# Altium PCB PCB2.PcbDoc
Units mil, origin at the board's own origin, x right, y up, seen from the top; angles counter-clockwise.
Board outline 2320 x 2000 mil, 2 copper layers (Top Layer, Bottom Layer); 36 components, 23 nets, 154 pads, 22 vias.
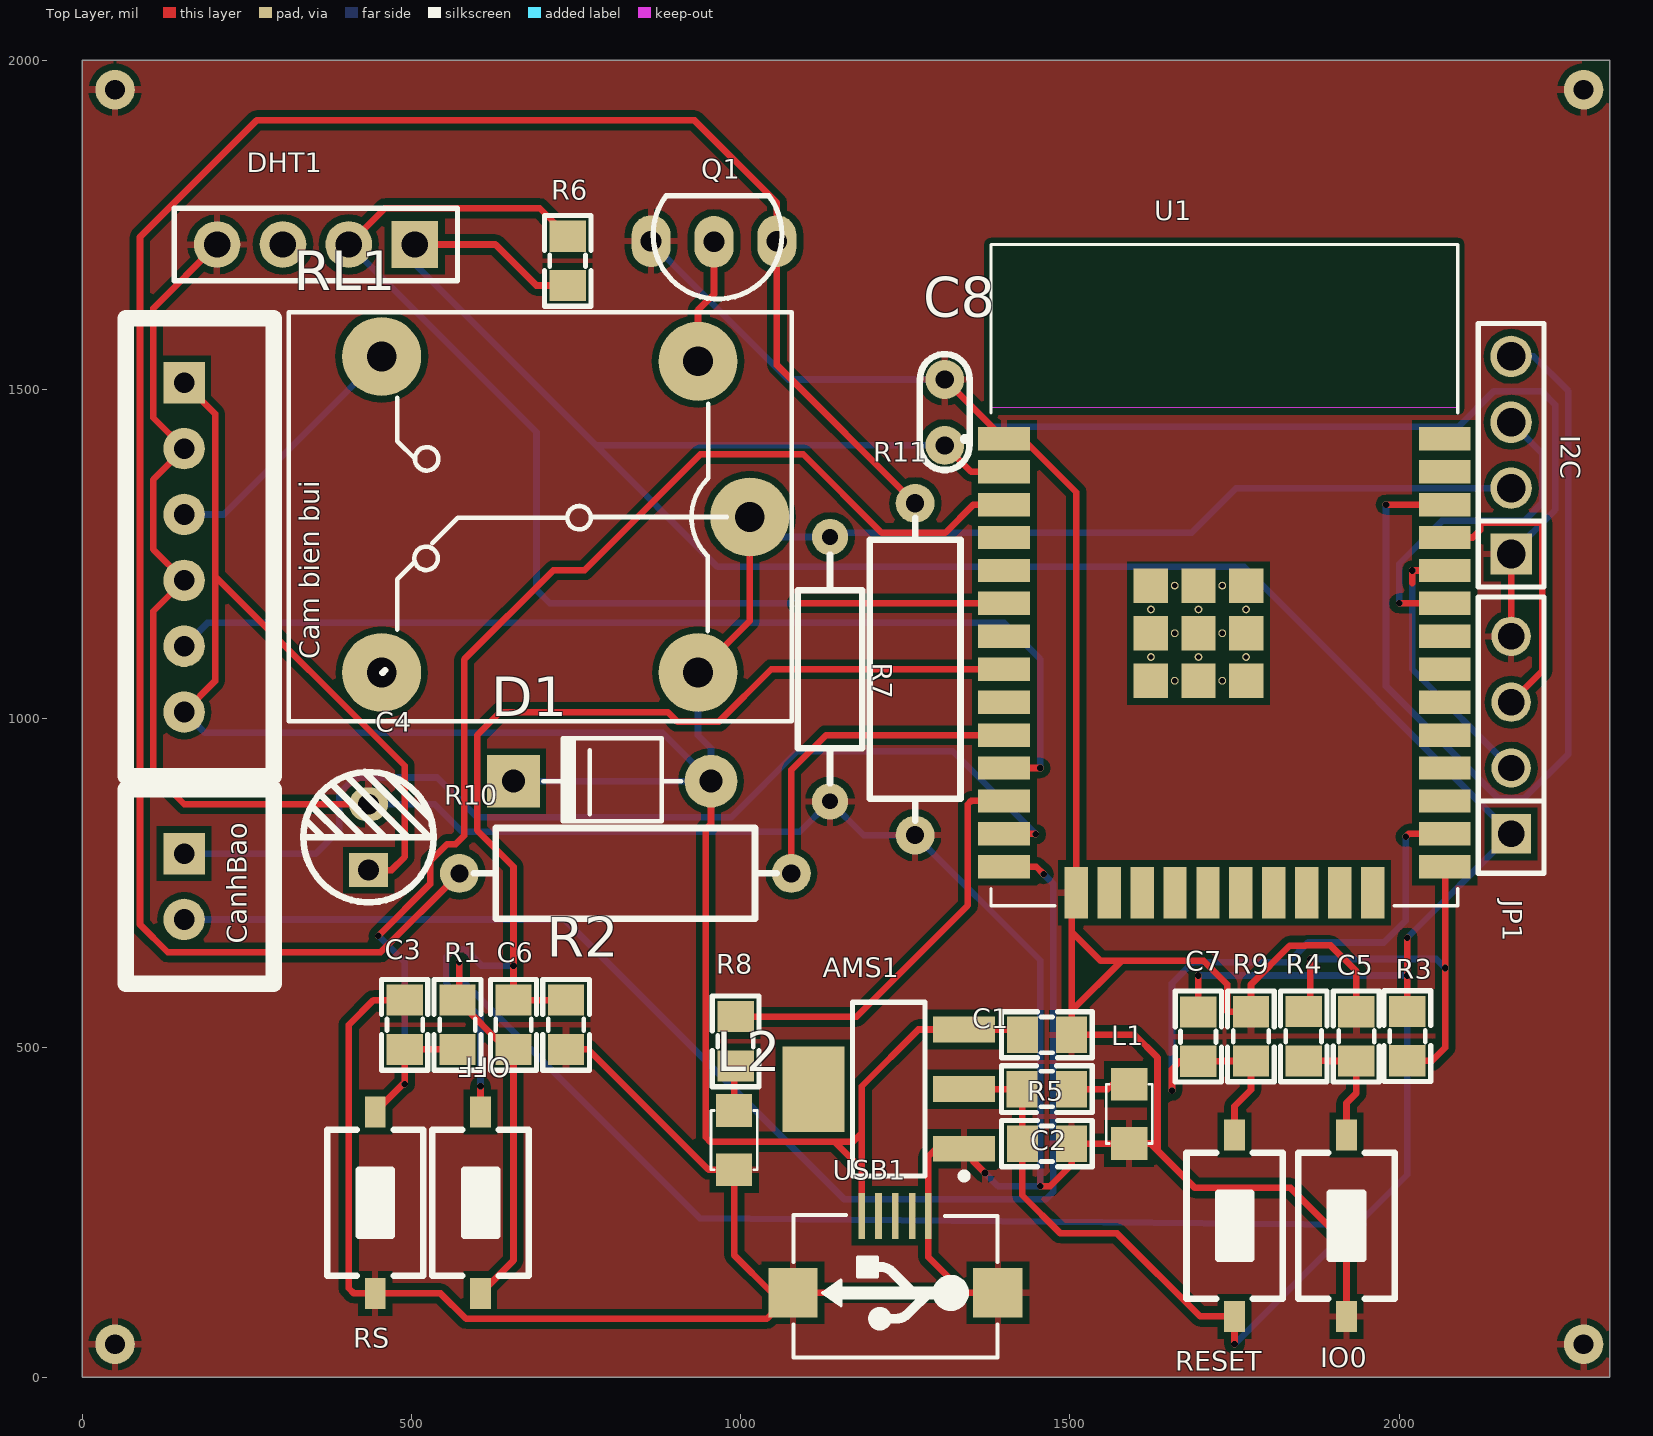
[diagram p0: Top Layer view]
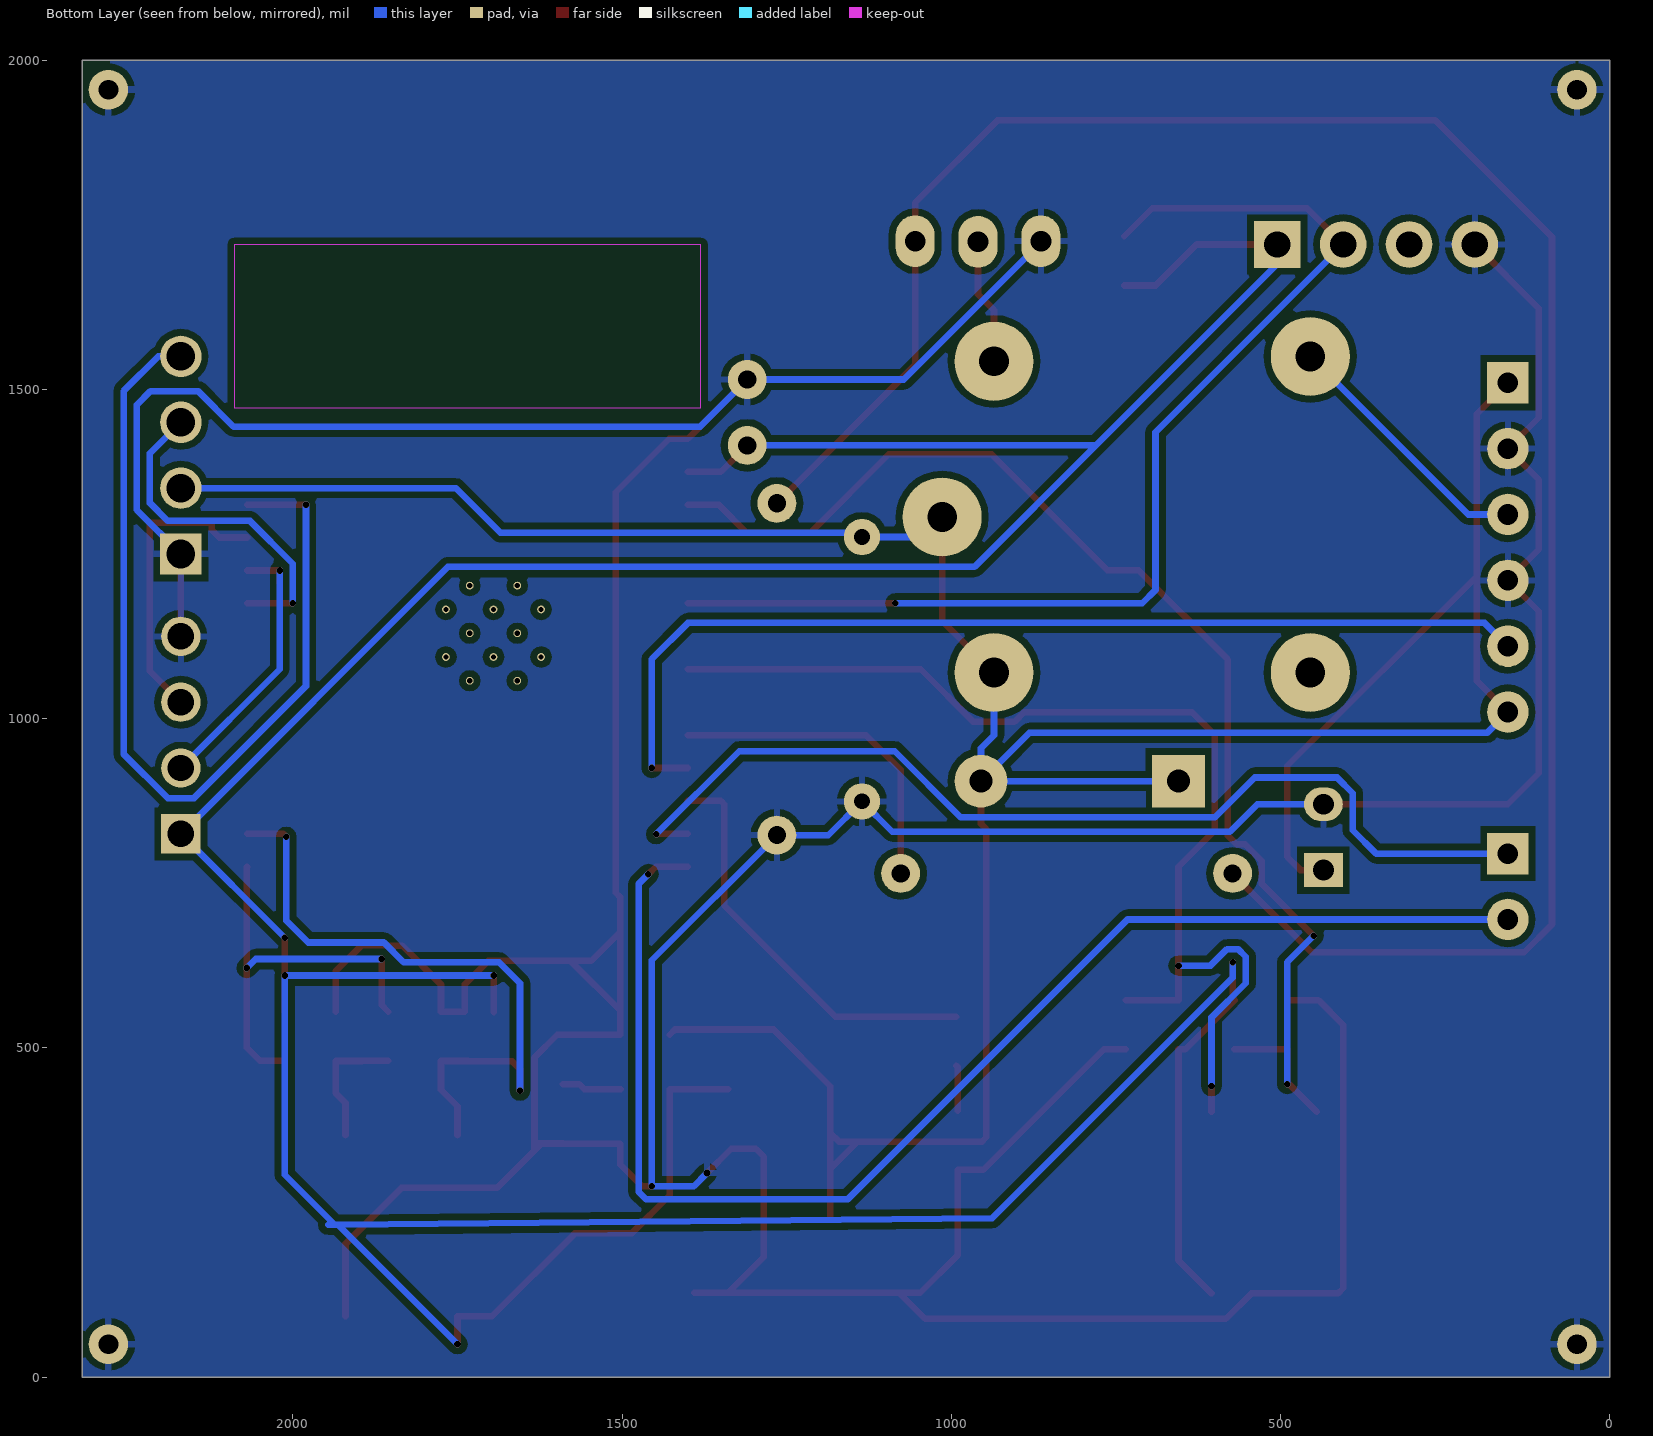
[diagram p1: Bottom Layer view, seen from below]
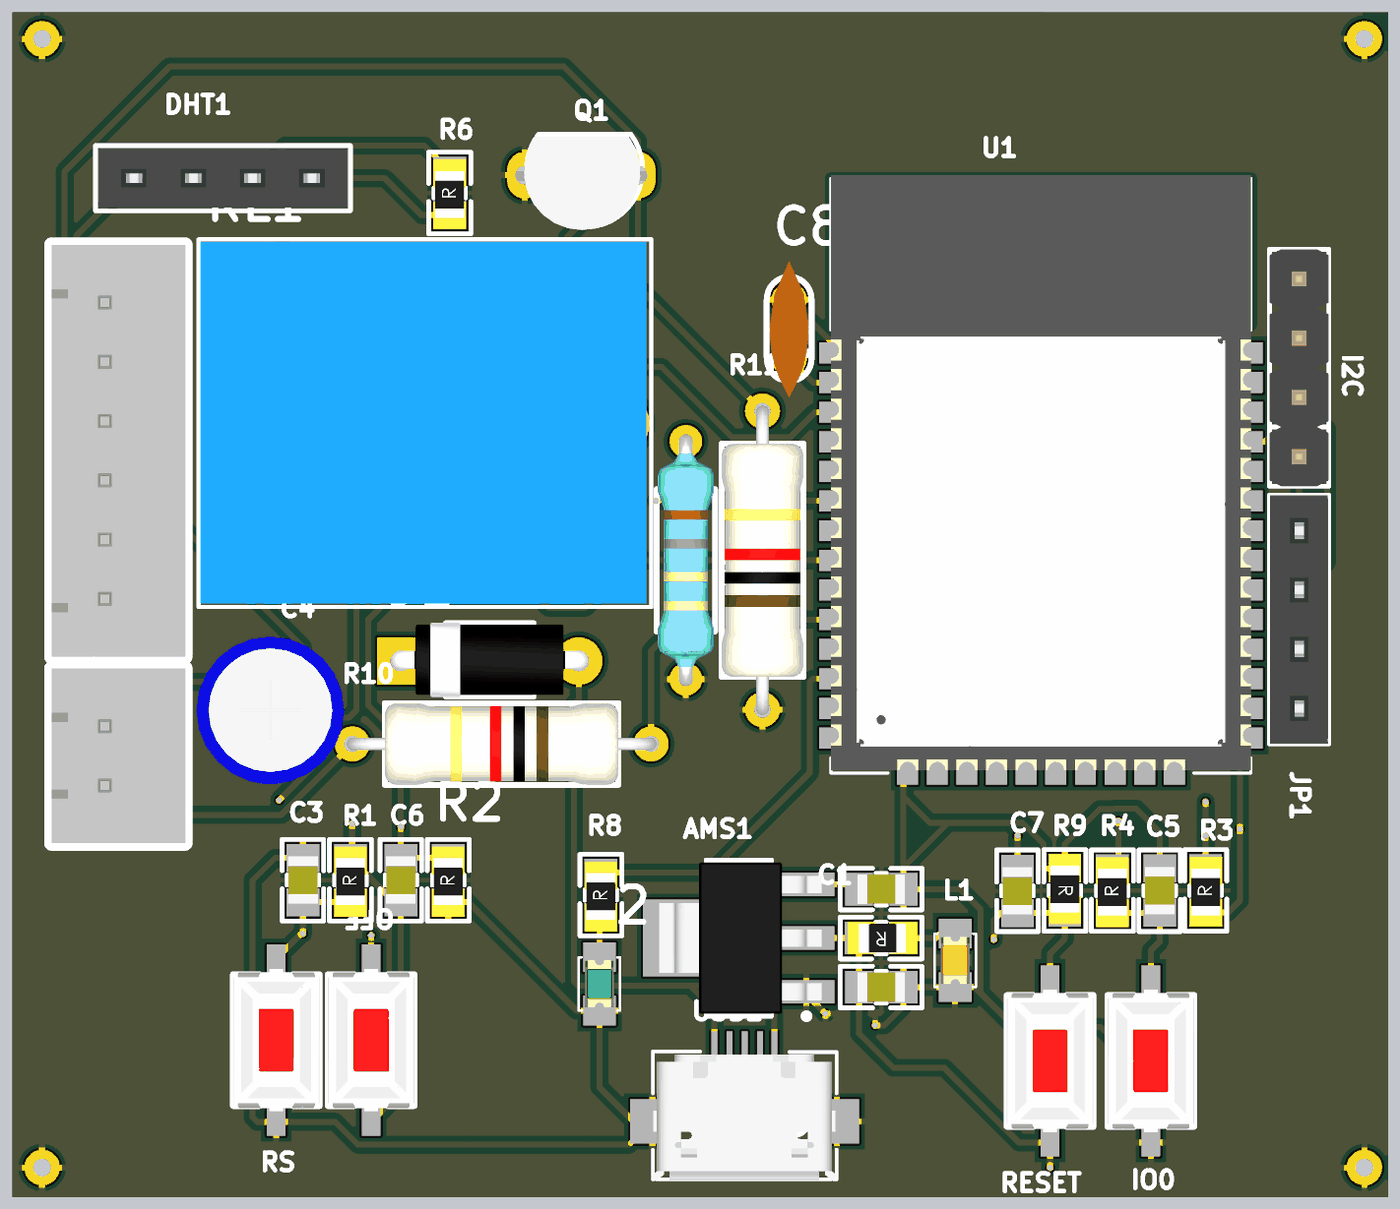
[diagram p2: 3D render of the assembled board from above, using the file's embedded part models]

## Layer stack, top to bottom
Top Solder: solder mask 0.4, Solder Resist, Dk 3.5
Top Layer: signal copper 1.4
Dielectric 1: dielectric 12.6, FR-4, Dk 4.8
Bottom Layer: signal copper 1.4
Bottom Solder: solder mask 0.4, Solder Resist, Dk 3.5

## Board outline
0,2000 2320,2000 2320,0 0,0

## Design rules (kind name [scope] priority, off if disabled: settings)
Clearance [All] p1: gap=10 ignorepadtopadclearanceinfootprint=FALSE except(0: Arc-Hole Track-Hole SMDPad-Hole THPad-Hole Via-Hole Fill-Hole Poly-Hole Region-Hole Text-Hole)
PolygonConnect [All] p1: connectstyle=Relief reliefconductorwidth=10 reliefentries=4 polygonreliefangle="90 Angle" airgapwidth=10
RoutingVias [All] p1: holewidth=10 width=10 viastyle="Through Hole" minholewidth=10 minwidth=10 maxholewidth=28 maxwidth=50
SolderMaskExpansion [All] p1: expansion=4
Width [All] p1: maxlimit=50 minlimit=10 preferedwidth=10 minimp=50.000000 maximp=50.000000 favimp=50.000000
30 further rules are at their usual default settings.

## Components (designator, comment, footprint, x,y, rotation, side; value= is the part's Value field where it differs from the comment)
AMS1 "AMS1117-3.3V" SOT223 1225,437.4 r90 top value="AMS1117-3.3V SOT223"
C1 "10uF" "tu 0805" 1465,520 r0 top
C2 "10uF" "tu 0805" 1465,354.58 r0 top
C3 "101" "tu 0805" 489.87,535 r90 top
C4 "220uF" "Tu hoa 5mm" 435,820 r90 top
C5 "101" "tu 0805" 1934.87,517.29 r90 top
C6 "101" "tu 0805" 655,535 r90 top
C7 "101" "tu 0805" 1695,517.29 r270 top
C8 "104" "tu gom" 1310,1465 r270 top
"Cam bien bui" "Cam bien bui" XH2.54M-6 155,1510 r270 top
CanhBao "Header 2P 2.54 Duc Thang" XH2.54M-2 155,795 r270 top
D1 "100v" "DIODE 1A" 1005,905 r0 top
DHT1 "DHT22" DHT22 355,1720 r180 top
I2C "JP 1x4 2.54" "JP 1x4 DT" 2170,1250 r90 top
IO0 "Nut Nhan 2 Chan SMD 3x6x2.5" "Nut Nhan 2 Chan SMD 3x6x2.5" 1920,230 r90 top
JP1 "chan nap" "JP 1x4 CT" 2170,825 r90 top
L1 "LED 0805" LED-0805-Orange 1590,444.8 r270 top
L2 "LED 0805" LED-0805-Green 990,405 r270 top
OFF "Nut Nhan 2 Chan SMD 3x6x2.5" "Nut Nhan 2 Chan SMD 3x6x2.5" 605,265 r270 top
Q1 "NPN" TRAN-LOWPOWER 965,1730 r90 top
R1 "10k" "tro smd 0805" 567.61,535 r90 top
R2 "470R" "Tro SMD 0805" 732.53,535 r90 top
R3 "12k" "tro smd 0805" 2010,517.77 r90 top
R4 "470R" "Tro SMD 0805" 1852.61,517.43 r90 top
R5 "1k" "tro smd 0805" 1465,435 r180 top
R6 "10k" "tro smd 0805" 735,1695 r90 top
R7 "1.5k" "tro vach 1/4w" 1135.74,1075 r90 top
R8 "330" "Tro SMD 0805" 990,510 r90 top
R9 "470R" "Tro SMD 0805" 1777.39,517.64 r270 top
R10 "0.33R" "tro vach 1/2w" 825,765 r180 top
R11 "10k" "tro vach 1/2w" 1265,1075 r90 top
RESET "Nut Nhan 2 Chan SMD 3x6x2.5" "Nut Nhan 2 Chan SMD 3x6x2.5" 1750,230 r270 top
RL1 "Relay" "Relay 5 Chan SRD" 1014.06,1306.22 r180 top
RS "Nut Nhan 2 Chan SMD 3x6x2.5" "Nut Nhan 2 Chan SMD 3x6x2.5" 445,265 r90 top
U1 "ESP32 WROOM 32" ESP32-WROOM-32D 1734.65,1217.91 r0 top
USB1 "USB Micro 5p SMD" "USB Micro 5p SMD" 1235,245 r180 top

## Footprints (in the part's own frame and the unit in brackets; to place one, negate y for a bottom-side part, rotate by r counter-clockwise, add the part's x,y. Pads: shape width x height; smd on the part's side, far side on the other; paste and mask are expansions set on the pad)
DHT22 [mm]
  rect 1.8x1.8 hole 1.02: 1(-3.81,0)
  round 1.8 hole 1.02: 2(-1.27,0) 3(1.27,0) 4(3.81,0)
  silkscreen extent -5.46,-1.4 5.46,1.4, body extent -7.86,-5.84 7.61,2.31, height 35.57
"DIODE 1A" [mil] "Diode 1A"
  round 80 hole 35: 1(-50,0)
  rect 80x80 hole 35: 2(-350,0)
  silkscreen extent -305,-61 -95,65, body extent -366,-61 -34,65, height 122
ESP32-WROOM-32D [mm]
  rect 2x0.9 smd: 1(-8.5,5.26) 2(-8.5,3.99) 3(-8.5,2.72) 4(-8.5,1.45) 5(-8.5,0.18) 6(-8.5,-1.09) 7(-8.5,-2.36) 8(-8.5,-3.63) 9(-8.5,-4.9) 10(-8.5,-6.17) 11(-8.5,-7.44) 12(-8.5,-8.71) 13(-8.5,-9.98) 14(-8.5,-11.25) 25(8.5,-11.25) 26(8.5,-9.98) 27(8.5,-8.71) 28(8.5,-7.44) 29(8.5,-6.17) 30(8.5,-4.9) 31(8.5,-3.63) 32(8.5,-2.36) 33(8.5,-1.09) 34(8.5,0.18) 35(8.5,1.45) 36(8.5,2.72) 37(8.5,3.99) 38(8.5,5.26)
  rect 0.9x2 smd: 15(-5.715,-12.25) 16(-4.445,-12.25) 17(-3.175,-12.25) 18(-1.905,-12.25) 19(-0.635,-12.25) 20(0.635,-12.25) 21(1.905,-12.25) 22(3.175,-12.25) 23(4.445,-12.25) 24(5.715,-12.25)
  rect 1.33x1.33 smd: 39(-2.835,-4.075) 39(-2.835,-2.24) 39(-2.835,-0.405) 39(-1,-4.075) 39(-1,-2.24) 39(-1,-0.405) 39(0.835,-4.075) 39(0.835,-2.24) 39(0.835,-0.405)
  round 0.3 hole 0.2: 39(-2.835,-3.157) 39(-2.835,-1.322) 39(-1.917,-4.075) 39(-1.917,-2.24) 39(-1.917,-0.405) 39(-1,-3.157) 39(-1,-1.322) 39(-0.082,-4.075) 39(-0.082,-2.24) 39(-0.082,-0.405) 39(0.835,-3.157) 39(0.835,-1.322)
  Keep-Out Layer region: 9,6.45 -9,6.45 -9,12.75 9,12.75
  Keep-Out Layer region: 9,6.45 -9,6.45 -9,12.75 9,12.75
  silkscreen extent -10.1,-12.75 9,12.75, body extent -9,-12.62 9,12.88, height 3.2
"JP 1x4 CT" [mm]
  rect 1.52x1.52 hole 1.02: 1(0,0)
  round 1.52 hole 1.02: 2(2.54,0) 3(5.08,0) 4(7.62,0)
  silkscreen extent -1.52,-1.27 9.14,1.27, body extent -1.52,-1.25 9.14,1.25, height 8.51
"JP 1x4 DT" [mm] "4 pins, 1 row, straight, gold plating"
  rect 1.6x1.6 hole 1.1: 1(0,0)
  round 1.6 hole 1.1: 2(2.54,0) 3(5.08,0) 4(7.62,0)
  silkscreen extent -1.27,-1.27 8.89,1.27, body extent -1.27,-1.27 8.89,1.27, height 8.54
LED-0805-Green [mil]
  rect 50x55 smd: 1(0,0) 2(90,0)
  silkscreen extent 0,-35 90,35, body extent 5,-25 85,25, height 43
LED-0805-Orange [mil]
  rect 50x55 smd: 1(0,0) 2(90,0)
  silkscreen extent 0,-35 90,35, body extent 5,-25 85,25, height 43
"Nut Nhan 2 Chan SMD 3x6x2.5" [mm] "Switch SMD type"
  rect 1.2x0.8 smd: 1(-3.5,0) 2(3.5,0)
  silkscreen extent -2.82,-1.85 2.82,1.85, body extent -3.05,-1.85 3.05,1.85, height 2.5
"Relay 5 Chan SRD" [mil] "Relay SPDT, 5 pin, 10A,W 650mil, L 800mil, H 800mil"
  round 120 hole 45: 1(0,0) 2(559.06,236.22) 3(559.06,-243.78) 4(78.74,-236.22) 5(78.74,236.22)
  silkscreen extent -63,-311 700,310, body extent -55,-306 697,304, height 602
SOT223 [mm]
  rect 1x2.4 smd: 1(-2.3,-2.9) 2(0,-2.9) 3(2.3,-2.9)
  rect 3.3x2.4 smd: 4(0,2.9)
  silkscreen extent -3.47,-3.03 3.35,1.4, body extent -3.25,-3.56 3.25,3.4, height 1.68
TRAN-LOWPOWER [mm] "TO, Flat Index; 3 In-Line, Axial Leads; Body Dia. 4.5mm; Leads 0.51 x 0.48 mm (max)"
  oval 2x1.5 hole 0.8: 1(-0.127,-2.286) 2(-0.151,0.139) 3(-0.127,2.564)
  silkscreen extent -2.35,-2.48 1.63,2.48, body extent -2.48,-2.79 1.52,3.01, height 11
"tro smd 0805" [mm]
  rect 1.2x1.4 smd: 1(-0.946,-0.061) 2(0.954,-0.061)
  silkscreen extent -1.75,-0.97 1.75,0.84, body extent -1.56,-0.76 1.44,0.64, height 0.53
"Tro SMD 0805" [mm]
  rect 1.2x1.4 smd: 1(-0.946,-0.061) 2(0.954,-0.061)
  silkscreen extent -1.75,-0.97 1.75,0.84, body extent -1.56,-0.76 1.44,0.64, height 0.53
"tro vach 1/2w" [mm]
  round 1.5 hole 0.7: 1(-6.4,0) 2(6.4,0)
  silkscreen extent -5.84,-1.75 5.84,1.75, body extent -6.62,-1.75 6.62,1.75, height 3.5
"tro vach 1/4w" [mm]
  round 1.4 hole 0.6: 1(-5.1,0) 2(5.1,0)
  silkscreen extent -4.39,-1.25 4.42,1.25, body extent -5.38,-1.2 5.38,1.2, height 2.41
"tu 0805" [mm] "Compoment SMD 80x50mil"
  rect 1.2x1.4 smd: 1(-0.946,-0.003) 2(0.954,-0.003)
  silkscreen extent -1.75,-0.89 1.75,0.89, body extent -1.01,-0.64 1.01,0.63, height 0.61
"tu gom" [mm] "Tu gom mini"
  round 1.5 hole 0.7: 1(-1.27,0) 2(1.27,0)
  silkscreen extent -2.25,-0.97 2.22,0.97, body extent -2.92,-0.85 2.92,0.85, height 6.12
"Tu hoa 5mm" [mm]
  rect 1.3x1.5 hole 0.8: 1(-1.27,0)
  oval 1.3x1.5 hole 0.8: 2(1.27,0)
  silkscreen extent -2.51,-2.51 2.51,2.51, body extent -3.12,-3.18 3.23,3.18, height 14.55
"USB Micro 5p SMD" [mil]
  rect 10x70 smd: 1(51.18,0) 2(25.59,0) 3(0,0) 4(-25.59,0) 5(-50,0)
  rect 74.8x74.8 smd: 5(-155.51,116.84) 5(155.51,116.84)
  silkscreen extent -155,-1 155,215, body extent -157,5 158,218, height 107
XH2.54M-2 [mm]
  rect 1.6x1.6 hole 0.8: 1(0,0)
  round 1.6 hole 0.8: 2(2.54,0)
  silkscreen extent -2.48,-2.26 5.02,3.46, body extent -2.48,-2.26 5.02,3.48, height 6.91
XH2.54M-6 [mm]
  rect 1.6x1.6 hole 0.8: 1(0,0)
  round 1.6 hole 0.8: 2(2.54,0) 3(5.08,0) 4(7.62,0) 5(10.16,0) 6(12.7,0)
  silkscreen extent -2.48,-2.26 15.18,3.46, body extent -2.48,-2.26 15.18,3.48, height 6.91

## Part data
AMS1: library part "AMS1117 SMD", "Dán", Chung_Loai=Dán, Don_Vi=Con, Ma_Hang=MH000596
C1 C2: library part "Tu 0805 10pF 50V 10%", "Dán", Chung_Loai=Dán, Don_Vi=Con, Ma_Hang=MH004554, So_Chan=2, Ten_Linh_Kien="T? 0805 10P 10% 50V"
C3 C5 C6 C7: library part "Tu 0805 101 50V 20%", "Dán", Chung_Loai=Dán, Don_Vi=Con, Ma_Hang=MH002806, So_Chan=2, Ten_Linh_Kien="T? 0805 101-0.1nF 50V 20%"
C4: library part "Tu Hoa 220uF 16V 6x11", "C?m", Chung_Loai=C?m, Don_Vi=Con, Ma_Hang=MH001348, So_Chan=2, Ten_Linh_Kien="T? Hóa 220uF 16V 6x11MM"
C8: library part "Tu gom 104 50V", "C?m", Chung_Loai=C?m, Don_Vi=Con, Ma_Hang=MH004761, So_Chan=2, Ten_Linh_Kien="T? g?m 104 100nF 50V"
"Cam bien bui": library part "Header 6P 2.54 Duc Thang", "C?m", Chung_Loai=C?m, Don_Vi=Con, Ma_Hang=MH001972, Ten_Linh_Kien="Header 6P XH2.54-6P Ð?c Th?ng"
CanhBao: "C?m", Chung_Loai=C?m, Don_Vi=Con, Ma_Hang=MH001283, Ten_Linh_Kien="Header 2P XH2.54-2P Ð?c Th?ng"
D1: library part "Diode 1N4007", "C?m", Chung_Loai=C?m, Don_Vi=Con, Ma_Hang=MH001063, Ten_Linh_Kien="Diode 1N4007 1A (DIP)"
DHT1: Manufacturer="W¨¹rth Elektronik eiSos GmbH", partNo=613004143121, ComponentLink1 Description=Manufacturer, ComponentLink1URL=http://www.we-online.com, ComponentLink2 Description=Datasheet, ComponentLink2URL=http://katalog.we-online.de/em/datasheet/6130xx143121.pdf, Created by="Karrer Zheng", Created Date="29 March 2013", NoPins=04
I2C: library part "JP 1x4 2.54 Duc Thang", "C?m", Chung_Loai=C?m, Don_Vi=Con, Ma_Hang=MH000903, Ten_Linh_Kien="Jump Ðon Ð?c 2.54MM 1x40P Th?ng 11MM"
JP1: library part "JP 1x4 2.54 Cai Thang", "C?m", Chung_Loai=C?m, Don_Vi=Con, Ma_Hang=MH004006, Ten_Linh_Kien="Jump Ðon Cái 2.54MM 1x20P Th?ng"
L1: library part "LED 0805 Cam", "Dán", Chung_Loai=Dán, Don_Vi=Con, Ma_Hang=MH002328, Ten_Linh_Kien="LED 0805 Màu Cam ( Orange)"
L2: library part "LED 0805 Xanh La", "Dán", Chung_Loai=Dán, Don_Vi=Con, Ma_Hang=MH002326, Ten_Linh_Kien="LED 0805 Màu Xanh Lá (Green)"
Q1: "NPN General", PackageDocument=Sep-1998, Code_JEDEC=TO-92A, ComponentLink1Description="Manufacturer Link", ComponentLink1URL=http://www.fairchildsemi.com/, ComponentLink2Description=Datasheet, ComponentLink2URL=http://www.fairchildsemi.com/ds/2N%2F2N3904.pdf, DatasheetDocument=1997, LatestRevisionDate=15-Jan-2003, LatestRevisionNote="PCB Footprint 'BCY-W3/D4.7' replaced", PackageReference=TO-92A, Published=8-Jun-2000, Publisher="Altium Limited"
R1: library part "Tro 0805 1% 10k", "Dán", Chung_Loai=Dán, Don_Vi=Con, Ma_Hang=MH005473, So_Chan=2, Ten_Linh_Kien="Tr? 0805 1% 10k"
R2 R4 R8 R9: library part "Tro 0805 5% 470R", "Dán", Chung_Loai=Dán, Don_Vi=Con, Ma_Hang=MH005341, So_Chan=2, Ten_Linh_Kien="Tr? 0805 5% 470R"
R3: library part "Tro 0805 5% 12k", "Dán", Chung_Loai=Dán, Don_Vi=Con, Ma_Hang=MH005241, So_Chan=2, Ten_Linh_Kien="Tr? 0805 5% 12k"
R5: library part "Tro 0805 1% 1k", "Dán", Chung_Loai=Dán, Don_Vi=Con, Ma_Hang=MH005468, So_Chan=2, Ten_Linh_Kien="Tr? 0805 1% 1k"
R6: library part "Tro 0805 5% 10k", "Dán", Chung_Loai=Dán, Don_Vi=Con, Ma_Hang=MH005239, So_Chan=2, Ten_Linh_Kien="Tr? 0805 5% 10k"
R7: library part "Tro Vach 1/4W 5% 1.5k", "C?m", Chung_Loai=C?m, Don_Vi=Con, Ma_Hang=MH007284, So_Chan=2, Ten_Linh_Kien="Tr? V?ch 1/4w 5% 1.5k"
R10: library part "Tro Vach 1/2W 5% 0.33R", "C?m", Chung_Loai=C?m, Don_Vi=Con, Ma_Hang=MH007239, So_Chan=2, Ten_Linh_Kien="Tr? 5% 1/2w 0.33R"
R11: library part "Tro Vach 1/2W 5% 10k", "C?m", Chung_Loai=C?m, Don_Vi=Con, Ma_Hang=MH006206, So_Chan=2, Ten_Linh_Kien="Tr? 5% 1/2w 10k"
RL1: library part "Relay 5 Chan SRD", "Relay 5 Chan", Ma_Hang=MH009374, Ten="Relay 5V10A SRD-05VDC-SL-C Chính Hãng"
USB1: "USB Type B", Ma_Hang=MH001020, Ten="MicroUSB MK5P SMD"
IO0 OFF RESET RS: Ma_Hang=MH001036, Ten="Nút Nh?n 2 Chân 3x6x2.5MM SMD"

## Free pads (board coordinates)
  round 60 hole 30: 2(2280,1955) 3(50,1955) 4(50,50) 5(2280,50)

## Via types
v1: diameter 10, hole 10, Top Layer to Bottom Layer, 22 vias

## Nets (pads, with @x,y where several pads share a name; then routed paths per layer and width w, separated by ;. In a path a pad name is that pad's centre, name@x,y a point inside that pad or via, vN(x,y) a via of type N, cw(c..) or ccw(c..) an arc to the next point about the centre after c; other vN are vias at no path point)
3V3: AMS1.2 C2.1 C6.1 C7.1 C8.2 DHT1.1 JP1.1 OFF.2 R1.2 R3.2 R5.2 R6.1 RESET.2 U1.2 | length 7126.4
  Top Layer w10: DHT1.1 627.7,1720 689.92,1657.77 R6.1 ; v1(573.03,630) 573.03,575.61 R1.2 644.8,497.77 C6.1 655.13,177.34 OFF.2 ; C8.2 1350,1375 U1.2 ; AMS1.2 R5.2 1427.42,354.79 C2.1 1427.77,276.33 1485.77,218.33 1571.67,218.33 1697.79,92.21 RESET.2 v1(1750,50) ; C7.1 1695,554.65 v1(1695,610) ; R3.2 v1(2012.39,610) v1(2012.39,667.39)
  Bottom Layer w10: DHT1.1 505,1690.33 780.33,1415 ; v1(573.03,630) 573.03,606.54 938.24,241.33 1931.48,231.48 ; C8.2 780.33,1415 ; v1(1695,610) v1(2012.39,610) 2012.39,307.39 1936.43,231.43 ; v1(1750,50) 1931.48,231.48 ; 1946.33,231.33 1936.43,231.43 ; v1(2012.39,667.39) JP1.1 1764.67,1230.33 965,1230.33 780.33,1415 ; 1931.48,231.48 1936.43,231.43
5V: "Cam bien bui.1" "Cam bien bui.6" AMS1.3 C1.1 C4.1 D1.1 D1.2 I2C.2 R7.2 RL1.1 RL1.5 USB1.1 | length 5259.8
  Top Layer w10: 155,1010 202,1057 202,1216.33 ; 155,1510 202,1463 202,1216.33 ; C4.1 470,770 490,790 490,928.33 202,1216.33 ; RL1.5 1014.06,1148.74 RL1.1 ; D1.1 955,840.33 947,832.33 947,364.33 954,357.33 1142.82,357.33 ; USB1.1 1183.82,316.33 ; C1.1 1419.69,527.95 AMS1.3 1270,527.95 1183.82,441.77 1183.82,371.15 ; 1142.82,357.33 1170,357.33 1183.82,371.15 ; 1142.82,357.33 1183.82,316.33 ; 1183.82,316.33 1183.82,371.15
  Bottom Layer w10: 155,1010 186.67,978.33 881.67,978.33 D1.1 ; D1.2 D1.1 ; RL1.5 935.32,974.68 955,955 D1.1 ; RL1.1 1044.49,1275.79 R7.2 1142.4,1282.44 1685.11,1282.44 1752.67,1350 I2C.2
coi: CanhBao.2 U1.14 | length 2053.9
  Top Layer w10: U1.14 1449,775 v1(1460,764)
  Bottom Layer w10: CanhBao.2 732.53,695 1157.53,270 1463.28,270 1475,281.72 1475,749 v1(1460,764)
denbao: CanhBao.1 U1.13 | length 1541.8
  Top Layer w10: U1.13 1447.67,825 v1(1448.33,824.33)
  Bottom Layer w10: CanhBao.1 355,795 390.47,830.47 390.47,886.81 414.25,910.59 539.41,910.59 600,850 985.67,850 1086.1,950.44 1322.23,950.44 v1(1448.33,824.33)
dht: DHT1.2 R6.2 U1.6 | length 1733.9
  Top Layer w10: DHT1.2 460,1775 694.97,1775 R6.2 ; v1(1085,1175.33) 1399.67,1175.33 U1.6
  Bottom Layer w10: DHT1.2 690,1435 690,1195.33 710,1175.33 v1(1085,1175.33)
EN: C6.2 OFF.1 R2.2 U1.8 | length 1733.2
  Top Layer w10: OFF.1 v1(605,441.77) ; R2.2 C6.2 v1(655.13,625) 655.13,775.2 600,830.33 600,975 635,1010 889.25,1010 904.25,995 966.38,995 1046.38,1075 U1.8
  Bottom Layer w10: v1(605,441.77) 605,546.29 553.03,598.26 553.03,638.28 564.75,650 581.32,650 606.32,625 v1(655.13,625)
GND: "Cam bien bui.2" "Cam bien bui.4" AMS1.1 C1.2 C2.2 C3.2 C4.2 C5.2 C8.1 DHT1.4 I2C.1 IO0.1 JP1.4 L1.2 L2.2 pad.2 pad.3 pad.4 pad.5 Q1.3 R2.1 R7.1 R9.1 R11.1 RS.1 U1.1 U1.15 USB1.5 | length 10025.7
  Top Layer w10: DHT1.4 108,1623 108,1457 155,1410 108,1363 108,1257 155,1210 108,1163 108,917 155,870 C4.2 ; C3.2 442.57,572.57 405,535 405,135 412.8,127.2 RS.1 544.42,127.2 583.04,88.58 1039.91,88.58 USB1.5@1079.49,128.16 ; R2.1 768.56,497.77 951.33,315 L2.2 990,185.54 1047.38,128.16 USB1.5@1079.49,128.16 ; C8.1 U1.1 1428.3,1425 1509.65,1343.65 U1.15 1502.57,728.56 1502.57,676.33 ; v1(1371.02,310) 1334.17,346.84 1296.84,346.84 1285,335 1285,245 1285,182.33 1339.17,128.16 ; USB1.5@1390.51,128.16 1339.17,128.16 ; v1(1455,290) 1470,290 1502.57,322.57 C2.2 1589.65,354.45 L1.2 1622.54,354.79 ; IO0.1 1920,202.33 1835,287.33 1690,287.33 1633,344.33 ; C5.2 1935,616.33 1895.67,655.67 1858.17,655.67 1857.5,655 1833.67,655 1775,596.33 R9.1 1739,554.87 1739,596.33 1703.25,632.08 1578.32,632.08 ; JP1.4 I2C.1 ; USB1.5@1079.49,128.16 1339.17,128.16 ; 1502.57,556.33 1502.57,676.33 ; 1502.57,556.33 1578.32,632.08 ; 1502.57,556.33 C1.2 1598.47,519.87 1633,485.33 1633,354.79 ; 1502.57,676.33 1546.83,632.08 1578.32,632.08 ; 1622.54,354.79 1633,344.33 ; 1622.54,354.79 1633,354.79 ; 1633,344.33 1633,354.79
  Bottom Layer w10: C4.2 535.33,870 577,828.33 1089.87,828.33 R7.1 1186.92,823.03 R11.1 1455,633.03 v1(1455,290) 1391.02,290 v1(1371.02,310) ; Q1.3 864.06,1723.33 1072.39,1515 C8.1 1381.67,1443.33 2090,1443.33 2144,1497.33 2216,1497.33 2237,1476.33 2237,1317 I2C.1
IO0: R3.1 R4.2 U1.25 | length 635.9
  Top Layer w10: R4.2 1865,565 v1(1865,635) ; R3.1 2050,480.54 2070,500.54 v1(2070,621.33) 2070,775 U1.25
  Bottom Layer w10: v1(1865,635) 2056.33,635 v1(2070,621.33)
LedP: R10.1 U1.10 | length 502
  Top Layer w10: R10.1 1076.97,921.97 1130,975 U1.10
LP: "Cam bien bui.3" RL1.3 | length 399.4
  Bottom Layer w10: 155,1310 215,1310 RL1.3
M: "Cam bien bui.5" U1.11 | length 1557.8
  Top Layer w10: U1.11 v1(1455,925)
  Bottom Layer w10: 155,1110 190.33,1145.33 1400,1145.33 1455,1090.33 v1(1455,925)
NetC5_1: C5.1 IO0.2 R4.1 | length 198.5
  Top Layer w10: R4.1 1894,480.2 1894.13,480.06 C5.1 1935,431.33 1920,416.33 IO0.2
NetL1_1: L1.1 R5.1 | length 90.8
  Top Layer w10: R5.1 1557.4,437.4 1564.79,444.79 L1.1
NetL2_1: L2.1 R8.1 | length 68.8
  Top Layer w10: L2.1 990,470.38 R8.1
NetQ1_1: Q1.1 R10.2 R11.2 | length 3231.4
  Top Layer w10: R10.2 453.37,645.33 130,645.33 88,687.33 88,1731.33 265,1908.33 930,1908.33 1055,1783.33 Q1.1 1055,1536.97 R11.2
NetQ1_2: Q1.2 RL1.4 | length 191.6
  Top Layer w10: RL1.4 935.32,1620.33 959.53,1644.55 Q1.2
RESET: C7.2 R9.2 RESET.1 U1.26 | length 1026.5
  Top Layer w10: v1(1655,435) 1655,467.72 1667,479.72 C7.2 1734,479.72 1734.35,480.06 R9.2 1775,436.33 1750,411.33 RESET.1 ; v1(2010,820.64) 2014.36,825 U1.26
  Bottom Layer w10: v1(1655,435) 1655,598.28 1686.72,630 1831.72,630 1861.72,660 1976.72,660 2010,693.28 v1(2010,820.64)
RS: C3.1 R1.1 RS.2 U1.3 | length 1933.9
  Top Layer w10: RS.2 487.2,445 v1(490,445) C3.1 R1.1 ; v1(450,670.25) 528.5,748.76 528.5,783.44 554.59,809.53 567.48,809.53 580,822.05 580,1089.62 715.72,1225.33 763,1225.33 939,1401.33 1095,1401.33 1214,1282.33 1311,1282.33 1353.67,1325 U1.3
  Bottom Layer w10: v1(450,670.25) 490,630.25 v1(490,445)
RX: JP1.2 U1.34 | length 431.1
  Top Layer w10: 2020,1205.33 v1(2020,1225) U1.34
  Bottom Layer w10: v1(2020,1225) 2020,1075 JP1.2
SCL: I2C.4 U1.36 | length 1399.9
  Top Layer w10: v1(1980,1325) U1.36
  Bottom Layer w10: v1(1980,1325) 1980,1049.33 2150,879.33 2190,879.33 2257,946.33 2257,1497.33 2204.33,1550 I2C.4
SDA: I2C.3 U1.33 | length 526.9
  Top Layer w10: v1(2000,1175) U1.33
  Bottom Layer w10: v1(2000,1175) 2000,1235.33 2065,1300.33 2190,1300.33 2217,1327.33 2217,1403 I2C.3
TT: R8.2 U1.12 | length 633.2
  Top Layer w10: R8.2 1176.24,547.57 1305,676.33 1345,716.33 1345,870 1350,875 U1.12
TX: JP1.3 U1.35 | length 455.2
  Top Layer w10: U1.35 2111.67,1275 2123,1286.33 2123,1297.33 2217,1297.33 2217,1072 JP1.3
pads on no net: AMS1.4 DHT1.3 RL1.2 U1.4 U1.5 U1.7 U1.9 U1.16 U1.17 U1.18 U1.19 U1.20 U1.21 U1.22 U1.23 U1.24 U1.27 U1.28 U1.29 U1.30 U1.31 U1.32 U1.37 U1.38 U1.39 USB1.2 USB1.3 USB1.4

## Polygon pours and split planes (outlines as drawn)
GND on Top Layer "GND_L01_P076" (solid, pour order 76): 2320,2000 2320,0 0,0 0,2000
no net on Top Layer "NONET_L01_P056" (solid, pour order 56): 0,2000
GND on Top Layer "GND_L01_P004" (hatched Horizontal grid 20 track 8, pour order 4): -115,1401.33
GND on Bottom Layer "GND_L02_P074" (solid, pour order 74): 0,2000 0,0 2320,0 2320,2000
GND on Bottom Layer "GND_L02_P068" (solid, pour order 68): 2295,2050
GND on Bottom Layer "GND_L02_P048" (solid, pour order 48): 0,0
no net on Bottom Layer "NONET_L02_P044" (solid, pour order 44): 0,2000
GND on Bottom Layer "GND_L02_P038" (solid, pour order 38): 51.33,-148.37

## Text inside footprints (layer, text, board x,y; h text height)
U1: Mechanical 13 "ANTENNA" at 1498.43,1572.24 h70